# EAGLE board esp32-driver_Dio Faziko Pratama (EAGLE 9.6.2)
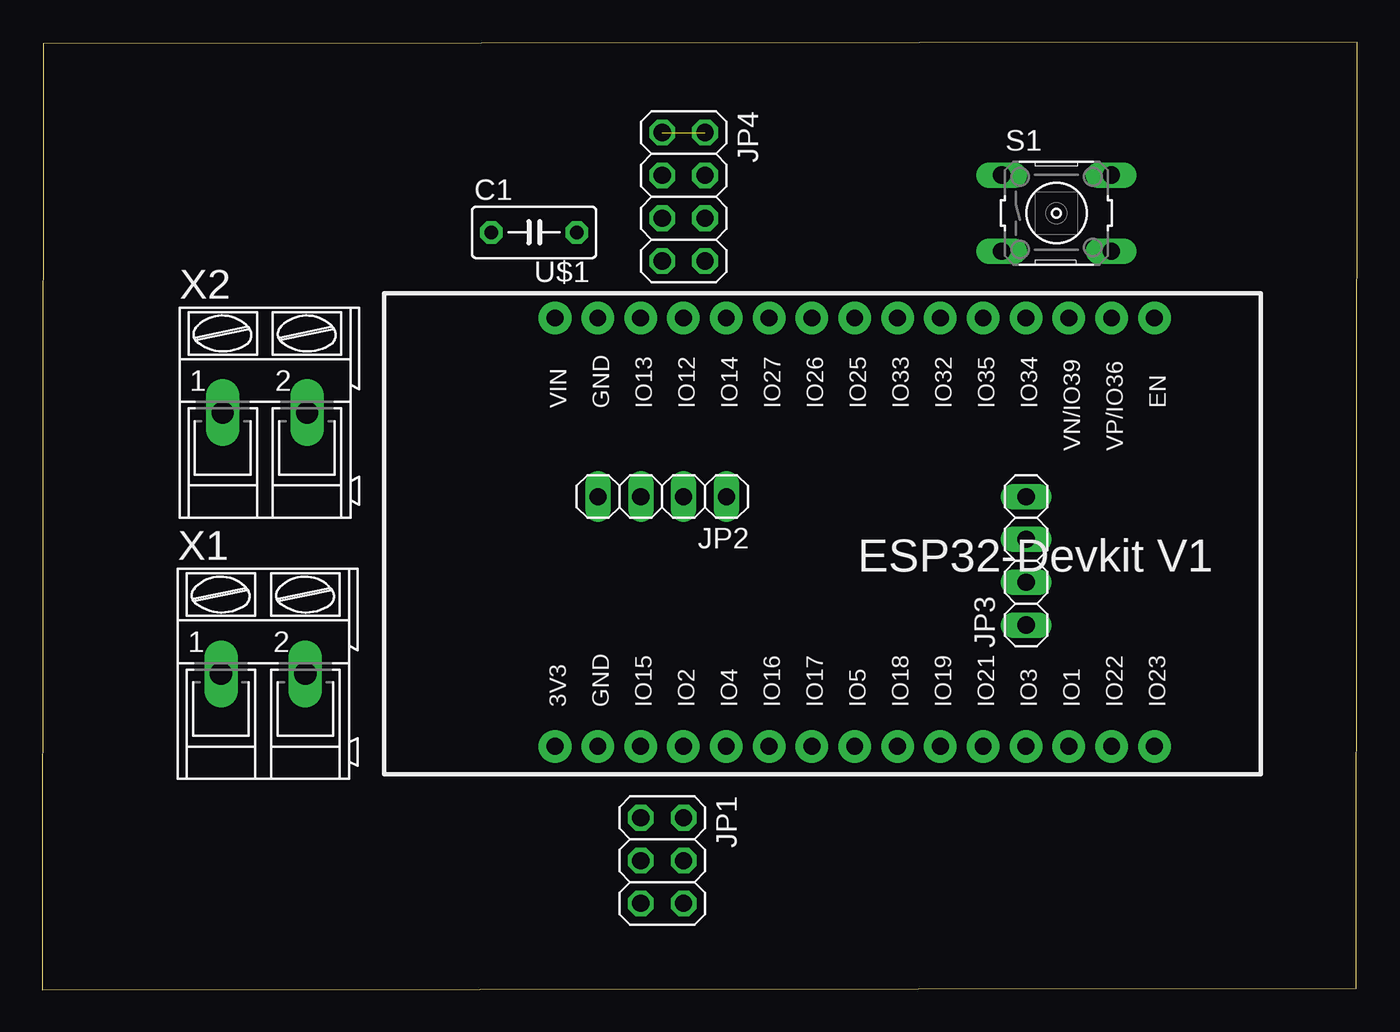
[diagram p0: board, top side]
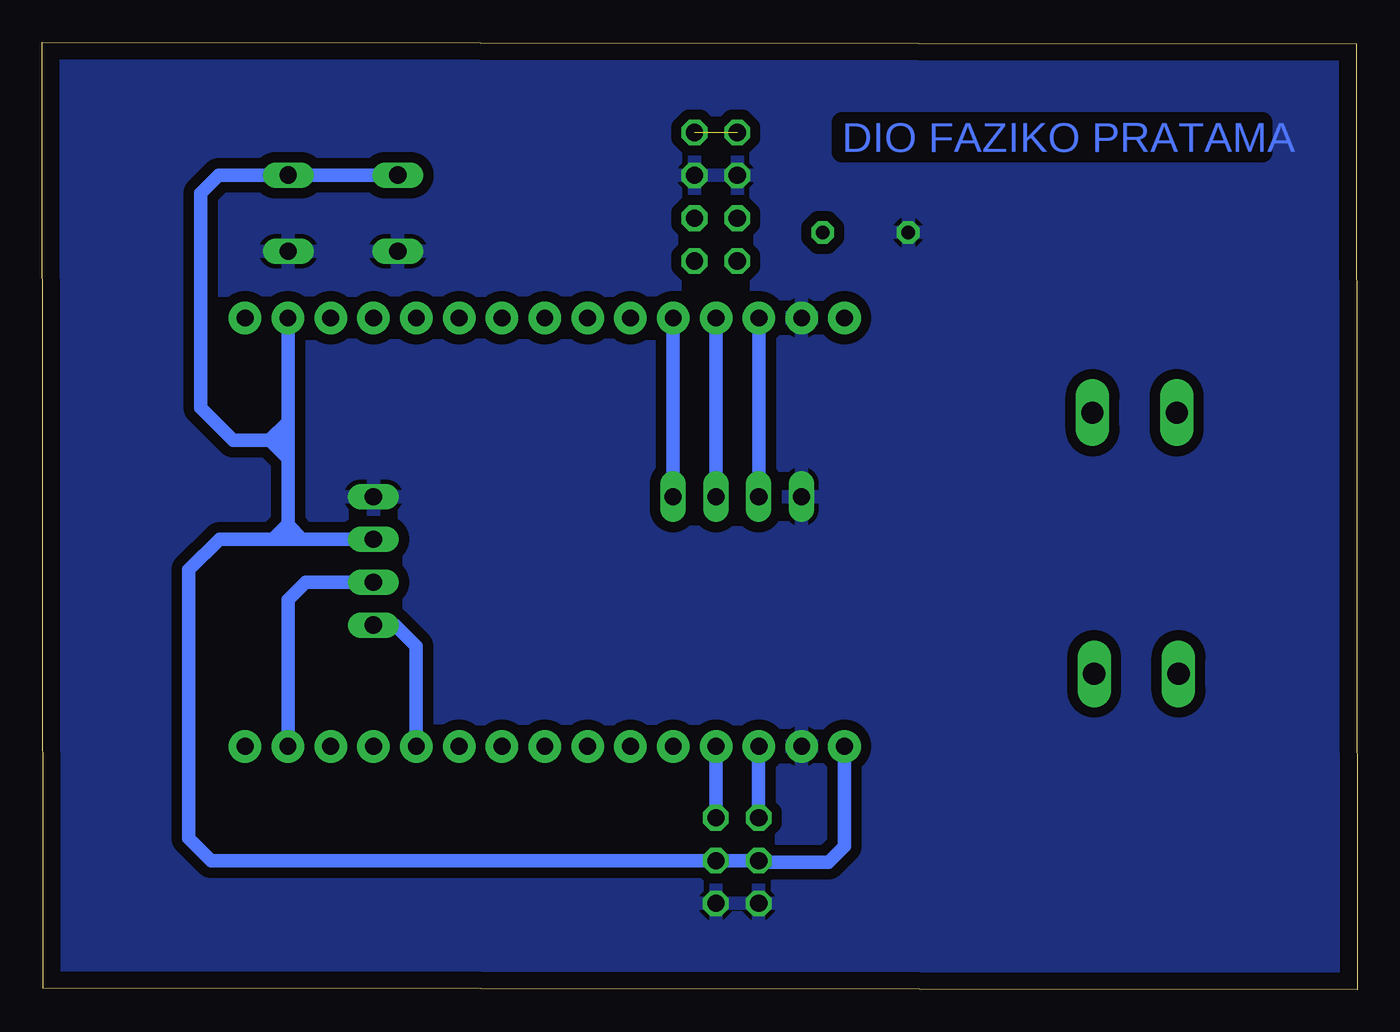
[diagram p1: board, bottom side, seen from below]

Size 78.03 x 56.2 mm. Coordinates in mm from the lower left corner, seen from the top.
Outline: 0,0 77.97,0.1 78.03,56.2 0.06,56.1 0,0
Copper layers (1*16): Top 0.035mm / dielectric 1.5mm / Bottom 0.035mm
Design rules "default": minimum track width 6mil, minimum drill 0.35mm, track to track 6mil, track to pad 6mil, pad to pad 6mil, via to via 6mil, smd to smd 6mil, copper to edge 40mil, drill to drill 6mil, minimum pad ring 10mil, minimum via ring 8mil, stop-mask expansion 4mil, vias tented up to drill 0mil, thermal gap 10mil

## Footprints (pad centres in the part's own frame; a part is rotated, then mirrored left to right if it is on the bottom)
C050-030X075 = drill 0.813 octagon: 1 -2.54,0; 2 2.54,0
2X03 = drill 1.016 octagon: 1 -2.54,-1.27; 2 -2.54,1.27; 3 0,-1.27; 4 0,1.27; 5 2.54,-1.27; 6 2.54,1.27
1X04 = drill 1.016 long: 1 -3.81,0; 2 -1.27,0; 3 1.27,0; 4 3.81,0
2X04 = drill 1.016 octagon: 1 -3.81,-1.27; 2 -3.81,1.27; 3 -1.27,-1.27; 4 -1.27,1.27; 5 1.27,-1.27; 6 1.27,1.27; 7 3.81,-1.27; 8 3.81,1.27
B3F-10XX = drill 1.016 long: 1 -3.251,2.261; 2 3.251,2.261; 3 -3.251,-2.261; 4 3.251,-2.261
ESP32-DEVKITV1 = drill 1 pad 1.93: 3V3 -16.52,-12.27; D1 13.96,-12.27; D2 -8.9,-12.27; D3 11.42,-12.27; D4 -6.36,-12.27; D5 1.26,-12.27; D12 -8.9,13.135; D13 -11.44,13.135; D14 -6.36,13.135; D15 -11.44,-12.27; D16 -3.82,-12.27; D17 -1.28,-12.27; D18 3.8,-12.27; D19 6.34,-12.27; D21 8.88,-12.27; D22 16.5,-12.27; D23 19.04,-12.27; D25 1.26,13.135; D26 -1.28,13.135; D27 -3.82,13.135; D32 6.34,13.135; D33 3.8,13.135; D34 11.42,13.135; D35 8.88,13.135; D36 16.5,13.135; D39 13.96,13.135; EN 19.04,13.135; GND@1 -13.98,13.135; GND@2 -13.98,-12.27; VIN -16.52,13.135
AK300/2 = drill 1.321 long: 1 -2.515,0; 2 2.489,0

## Placement (x,y rotation side)
C1  [C050-030X075]  29.19,44.92 0 top
JP1  [2X03]  36.79,7.66 270 top
JP2  [1X04]  36.79,29.25 180 top
JP3  [1X04]  58.38,25.44 90 top
JP4  [2X04]  38.06,47.03 270 top
S1  [B3F-10XX]  60.18,46.06 0 top
U$1  ESP32DEVKITV1  [ESP32-DEVKITV1]  46.95,26.71 0 top
X1  [AK300/2]  13.13,18.74 0 top
X2  [AK300/2]  13.23,34.23 0 top

## Library data of the parts
C1 = rcl; SPICEPREFIX: C
JP1-JP4 = pinhead
S1 = switch-omron; MPN: B3F-1000; OC_FARNELL: 176432; OC_NEWARK: 36M3542
U$1 = esp32-devkitv1
X1 X2 = con-ptr500; OC_FARNELL: unknown; OC_NEWARK: unknown

## Nets
GND: C1.1 JP1.5 JP1.6 JP2.4 JP3.4 JP4.3 JP4.4 S1.3 S1.4 U$1.GND@1 U$1.GND@2
MOISTURE: JP1.2 U$1.D2
OUT1: JP2.1 U$1.D14
OUT2: JP2.2 U$1.D12
OUT3: JP2.3 U$1.D13
PH: JP1.1 U$1.D15
S$1: JP4.1 JP4.2
SCL: JP3.2 U$1.D22
SDA: JP3.1 U$1.D21
V: JP1.3 JP1.4 JP3.3 S1.1 S1.2 U$1.3V3 U$1.D36
VIN: U$1.VIN

## Tracks (layer width: path | path; a pad name or v marks a point on that pad's centre or on a via)
GND
  pour Bottom (isolate 0.61): 0.33,55.96 0.33,0.41 77.83,0.41 77.83,55.96
MOISTURE
  Bottom 0.813: U$1.D2 JP1.2
OUT1
  Bottom 0.813: U$1.D14 JP2.1
OUT2
  Bottom 0.813: U$1.D12 JP2.2
OUT3
  Bottom 0.813: U$1.D13 JP2.3
PH
  Bottom 0.813: JP1.1 U$1.D15
S$1  (1 unrouted)
SCL
  Bottom 0.813: JP3.2 62.4,24.17 63.45,23.12 U$1.D22
SDA
  Bottom 0.813: U$1.D21 55.83,20.36 57.1,21.63 JP3.1
V
  Bottom 0.813: U$1.3V3 30.43,8.5 31.38,7.55 35.41,7.55 JP1.3 JP1.4 68.01,7.66 69.33,8.97 69.33,24.9 67.51,26.71 64.36,26.71 | 64.36,26.71 63.42,26.71 | 63.42,26.71 62.6,26.71 | 62.6,26.71 JP3.3 | U$1.D36 63.45,33.7 | 63.45,33.7 63.45,32.58 | 63.45,32.58 63.45,31.5 | 63.45,31.5 63.45,27.56 | 63.45,27.56 63.45,26.74 63.42,26.71 | 56.91,48.3 S1.1 S1.2 67.56,48.32 68.63,47.25 68.63,34.52 66.69,32.58 64.57,32.58 | 64.53,32.58 63.45,32.58 | 62.6,26.71 63.45,27.56 | 63.45,27.56 63.51,27.56 64.36,26.71 | 63.45,33.7 64.57,32.58 | 64.57,32.58 64.53,32.58 | 64.53,32.58 63.45,31.5

## Text on the board
Bottom: DIO FAZIKO PRATAMA